# Altium PCB DE-230724.PcbDoc
Units mil, origin at the board's own origin, x right, y up, seen from the top; angles counter-clockwise.
Board outline 1771.65 x 3346.46 mil, 2 copper layers (Top Layer, Bottom Layer); 62 components, 53 nets, 173 pads, 21 vias.
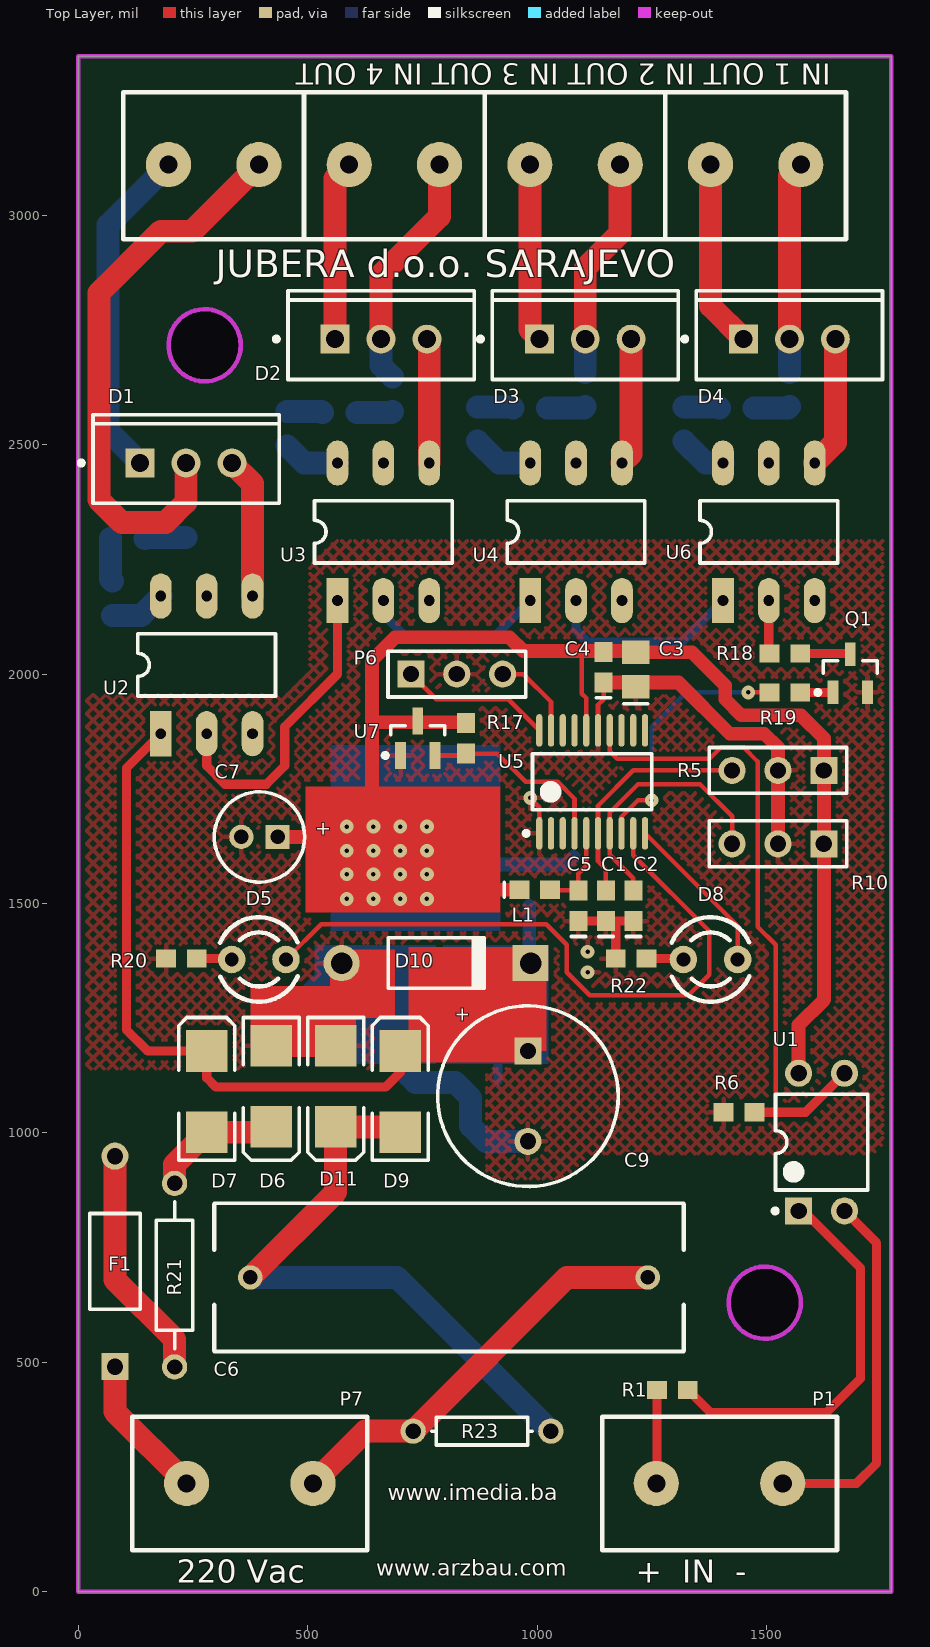
[diagram p0: Top Layer view]
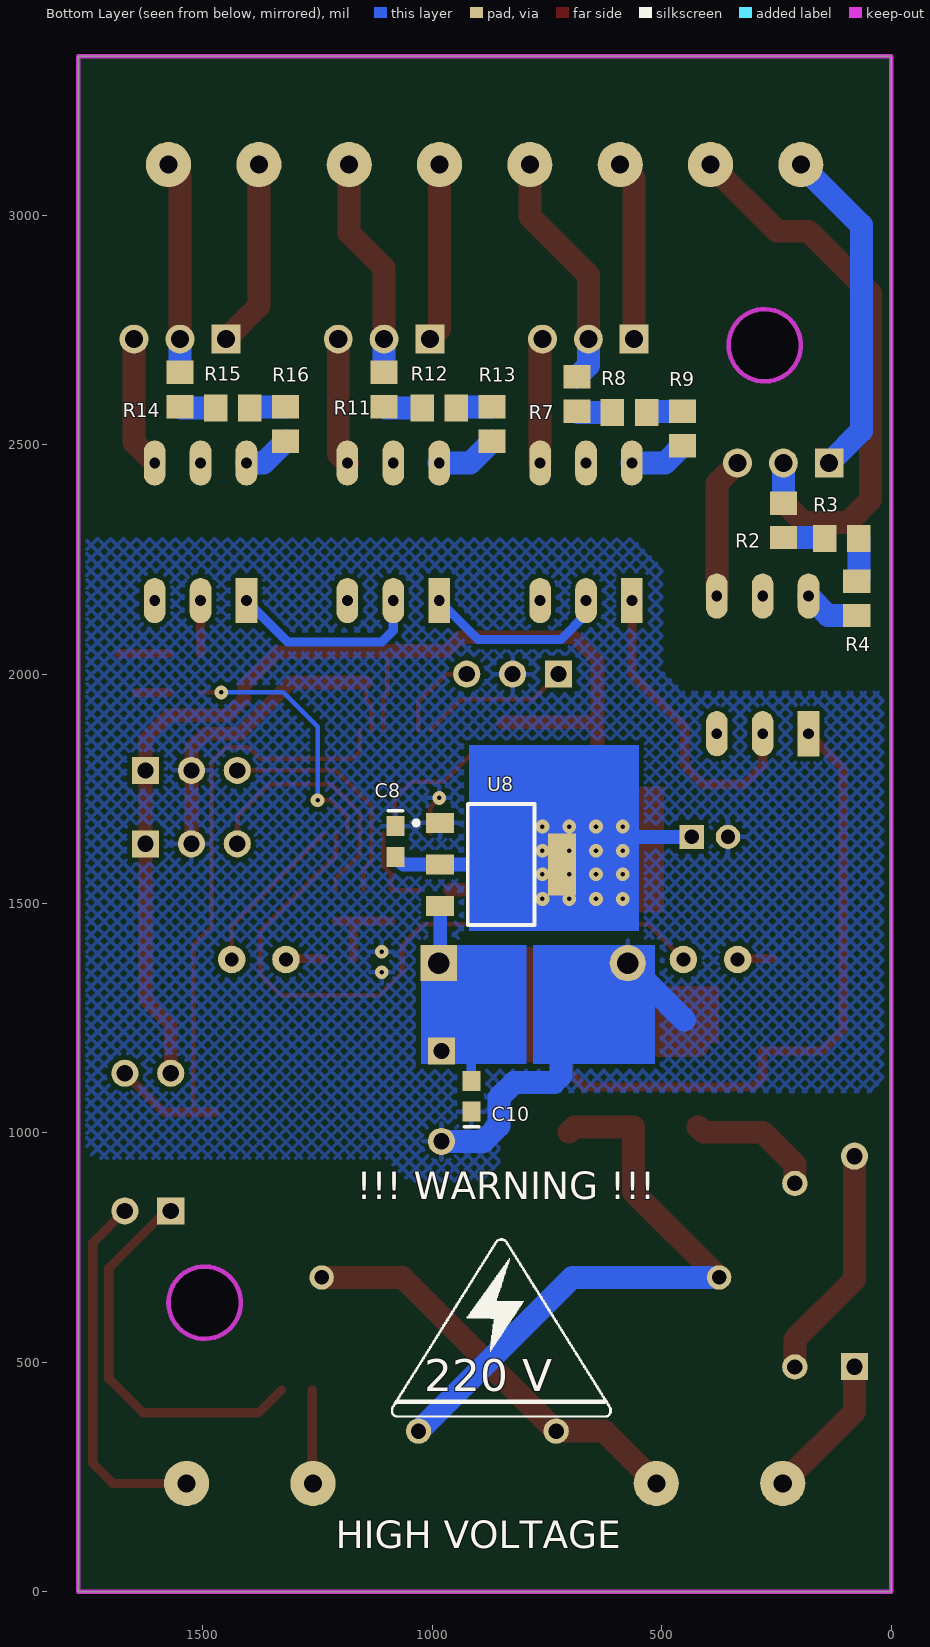
[diagram p1: Bottom Layer view, seen from below]

## Layer stack, top to bottom
Top Solder: solder mask 0.4, Solder Resist, Dk 3.5
Top Layer: signal copper 1.4
Dielectric 1: dielectric 12.6, FR-4, Dk 4.8
Bottom Layer: signal copper 1.4
Bottom Solder: solder mask 0.4, Solder Resist, Dk 3.5

## Board outline
0,0 0,3346.46 1771.65,3346.46 1771.65,0

## Design rules (kind name [scope] priority, off if disabled: settings)
Clearance [All] p1: gap=10 ignorepadtopadclearanceinfootprint=FALSE except(0: Arc-Hole Track-Hole SMDPad-Hole THPad-Hole Via-Hole Fill-Hole Poly-Hole Region-Hole Text-Hole; 5: Arc-SMDPad Track-SMDPad SMDPad-SMDPad)
HoleSize [All] p1: absolutevalues=TRUE maxlimit=200 minlimit=1 maxpercent=80.000 minpercent=20.000
MinimumSolderMaskSliver [All] p1: minsoldermaskwidth=1
PolygonConnect [All] p1: connectstyle=Relief reliefconductorwidth=10 reliefentries=4 polygonreliefangle="90 Angle" airgapwidth=10
RoutingVias [All] p1: holewidth=28 width=50 viastyle="Through Hole" minholewidth=10 minwidth=30 maxholewidth=28 maxwidth=50
SilkToSilkClearance [All] p1: silktosilkclearance=5
SilkToSolderMaskClearance [IsPad] p1: minsilkscreentomaskgap=5 clearancetoexposedcopper=TRUE
SolderMaskExpansion [All] p1: expansion=4 istentingtop=FALSE
Width [All] p1: maxlimit=100 minlimit=10 preferedwidth=20
26 further rules are at their usual default settings.

## Classes and differential pairs
component class DE-230724: C1 C2 C3 C4 C5 C6 C7 C8 C9 C10 D1 D2 D3 D4 D5 D6 D7 D8 D9 D10 D11 F1 L1 P1 P6 P7 Q1 R1 R2 R3 R4 R5 R6 R7 R8 R9 R10 R11 R12 R13 R14 R15 R16 R17 R18 R19 R20 R21 R22 R23 U1 U2 U3 U4 U5 U6 U7 U8

## Components (designator, comment, footprint, x,y, rotation, side; value= is the part's Value field where it differs from the comment)
C1 "C0603" 0603 1150,1495 r90 top value=100nF
C2 "C0603" 0603 1210,1495 r90 top value=100nF
C3 "C0805" 0805 1215,2010 r90 top value=10uF
C4 "C0603" 0603 1145,2015 r90 top value=100nF
C5 "C0603" 0603 1090,1495 r90 top value=100nF
C6 "330nF  X2" "0,33uF X2" 808.07,685 r180 top value=100nF
C7 "22uF" CAPPR2-5X11 395,1645 r180 top value=47uF
C8 "C0603" 0603 1080,1635 r270 bottom value=100nF
C9 "470uF" CAPPR5-10X12.5 980,1080 r270 top
C10 "C0603" 0603 915,1080 r90 bottom value=100nF
D1 "BTA16-600" ONSC-TO-220-3-221A-07 235,2460 r90 top
D2 "BTA16-600" ONSC-TO-220-3-221A-07 660,2730 r90 top
D3 "BTA16-600" ONSC-TO-220-3-221A-07 1105,2730 r90 top
D4 "BTA16-600" ONSC-TO-220-3-221A-07 1550,2730 r90 top
D5 "STATUS_LED" "LED 3mm" 393.7,1377.95 r0 top locked
D6 "1N4007" SMB 420.55,1101.81 r270 top
D7 "1N4007" SMB 279.99,1090 r90 top
D8 "HOLD_LED" "LED 3mm" 1377.95,1377.95 r0 top locked
D9 "1N4007" SMB 701.67,1090 r90 top
D10 "9V1" DO-41 780,1370 r0 top
D11 "1N4007" SMB 561.11,1101.81 r270 top
F1 "Fuse 1" PIN-W2/E2.8 80,720 r90 top
L1 "BLM15AG121" 0603 995,1530 r0 top
P1 "PULSE" "TERMINAL BLOK 2 - 7mm" 1397.64,236.22 r90 top locked
P2 "220Vac" "TERMINAL BLOK 2 - 3,5mm" 295.28,3110.24 r270 top locked
P3 "220Vac" "TERMINAL BLOK 2 - 3,5mm" 688.98,3110.24 r270 top locked
P4 "220Vac" "TERMINAL BLOK 2 - 3,5mm" 1082.68,3110.24 r270 top locked
P5 "220Vac" "TERMINAL BLOK 2 - 3,5mm" 1476.38,3110.24 r270 top locked
P6 "ICSP" HDR1X3 725,2000 r0 top
P7 "ACIN" "TERMINAL BLOK 2 - 7mm" 374.02,236.22 r90 top locked
Q1 "BC817" SOT23_N 1682.6,2001.34 r90 top
R1 "1K" ERA-0603 1295,440 r0 top
R2 "220R" ERA-0805 235,2335 r270 bottom
R3 "220R" ERA-0805 107.6,2295 r180 bottom
R4 "220R" ERA-0805 75,2165 r270 bottom
R5 "RPot" HDR1X3 1625,1790 r180 top value=10K
R6 "10K" ERA-0603 1440,1045 r180 top
R7 "220R" ERA-0805 685,2610 r270 bottom
R8 "220R" ERA-0805 570,2570 r180 bottom
R9 "220R" ERA-0805 455,2535 r270 bottom
R10 "RPot" HDR1X3 1625,1630 r180 top value=10K
R11 "220R" ERA-0805 1105,2620 r270 bottom
R12 "220R" ERA-0805 985,2580 r180 bottom
R13 "220R" ERA-0805 870,2545 r270 bottom
R14 "220R" ERA-0805 1550,2620 r270 bottom
R15 "220R" ERA-0805 1435,2580 r180 bottom
R16 "220R" ERA-0805 1320,2545 r270 bottom
R17 "10K" ERA-0603 845,1860 r90 top
R18 "470R" ERA-0603 1540,2045 r180 top
R19 "1K" ERA-0603 1540,1960 r0 top
R20 "10K" ERA-0603 225,1380 r180 top
R21 "Res2" AXIAL-0.4 210,690 r90 top value="470R 0.5W"
R22 "10K" ERA-0603 1205,1380 r180 top
R23 "Res1" AXIAL-0.3 880,350 r0 top value=1M
U1 "PC817" DIP-4 1620,980 r90 top
U2 "MOC3081" DIP6 180,1870 r90 top
U3 "MOC3081" DIP6 565,2160 r90 top
U4 "MOC3081" DIP6 985,2160 r90 top
U5 "STM32F030F4P6" STM-TSSOP20_N 1120,1765 r90 top
U6 "MOC3081" DIP6 1405,2160 r90 top
U7 "TLV803MDBZR" DBZ3_N 740,1860 r90 top
U8 "REG1117-3.3" ZZ311 850,1585 r270 bottom

## Footprints (in the part's own frame and the unit in brackets; to place one, negate y for a bottom-side part, rotate by r counter-clockwise, add the part's x,y. Pads: shape width x height; smd on the part's side, far side on the other; paste and mask are expansions set on the pad)
"0,33uF X2" [mm] "Capacitor, Ceramic, Thru-Hole, Dipped Radial; Body 11.5 x 3.6 mm (WxT) Pin Spacing 10.16 mm (typ)"
  round 1.35 hole 0.8: 1(-11,0) 2(11,0)
  silkscreen extent -13,-4.1 13,4.1, body extent -12.95,-4.06 12.95,4.06, height 16
0603 [mm] "Chip Capacitor; Body 1.6 x 0.8 mm (LxW typ)"
  rect 1.1x1 smd: 1(-0.85,0) 2(0.85,0)
  silkscreen extent -1.7,-0.4 -1.7,0.4
0805 [mm] "Chip Capacitor; Body 2.0 x 1.2 mm (LxW typ)"
  rect 1.3x1.5 smd: 1(-0.95,0) 2(0.95,0)
  silkscreen extent -1.9,-0.65 -1.9,0.65
AXIAL-0.3 [mm] "Axial Device, Thru-Hole; 2 Leads; 0.3 in Pin Spacing"
  round 1.4 hole 0.85: 1(-3.81,0) 2(3.81,0)
  silkscreen extent -2.77,-0.76 2.77,0.76
AXIAL-0.4 [mm] "Axial Device, Thru-Hole; 2 Leads; 0.4 in Pin Spacing"
  round 1.4 hole 0.85: 1(-5.08,0) 2(5.08,0)
  silkscreen extent -4.06,-1.02 4.06,1.02
CAPPR2-5X11 [mm] "Capacitor, Electrolytic, Radial; Body 5 x 11 mm (Dia.xH typ); Pin Spacing 2 mm (typ)"
  rect 1.35x1.35 hole 0.8: 1(-1,0)
  round 1.35 hole 0.8: 2(1,0)
  silkscreen extent -2.5,-2.5 2.5,2.5
CAPPR5-10X12.5 [mm] "Capacitor, Electrolytic, Radial; Body 10 x 12.5 mm (Dia.xH typ); Pin Spacing 5 mm (typ)"
  rect 1.5x1.5 hole 0.9: 1(-2.5,0)
  round 1.5 hole 0.9: 2(2.5,0)
  silkscreen extent -5,-5 5,5, body extent -5,-5 5,5, height 12.5
DBZ3_N [mm] "SOT23, 3-Leads, Body 2.9x1.3mm, Pitch 0.95mm, Lead Span 2.4mm, IPC Medium Density"
  rect 1.5x0.6 smd: 1(-0.95,0.95) 2(-0.95,-0.95) 3(0.95,0)
  silkscreen extent -1.07,-1.5 0.7,1.92, body extent -0.7,-1.52 0.7,1.52, height 1.12
DIP6 [mm]
  rect 2.5x1.2 hole 0.6: 1(0,0)
  oval 2.5x1.2 hole 0.6: 2(0,-2.54) 3(0,-5.08) 4(7.62,-5.08) 5(7.62,-2.54) 6(7.62,0)
  silkscreen extent 2.08,-6.35 5.54,1.27, body extent 0.63,-6.48 6.98,1.27, height 1
DIP-4 [mm] "DIP; 4 Leads; Row Spacing 7.62 mm; Pitch 2.54 mm"
  rect 1.5x1.5 hole 0.9: 1(-3.81,1.27)
  round 1.5 hole 0.9: 2(-3.81,-1.27) 3(3.81,-1.27) 4(3.81,1.27)
  silkscreen extent -3.93,-2.55 2.65,2.69, body extent -3.15,-2.5 3.15,2.5, height 5.6
DO-41 [mm] "Diode, Axial; Body 5.2 x 2.7 mm (LxDia. max), Lead Dia. 0.86 mm (max)"
  round 2 hole 1.2: 1(-5.23,0)
  rect 2x2 hole 1.2: 2(5.23,0)
  silkscreen extent -2.65,-1.4 2.75,1.4
ERA-0603 [mm] "Chip Resistor; Body 1.6 x 0.8 mm (LxW typ)"
  rect 1.1x1 smd: 1(-0.85,0) 2(0.85,0)
ERA-0805 [mm] "Chip Resistor; Body 2 x 1.3 mm (LxW typ)"
  rect 1.3x1.5 smd: 1(-0.95,0) 2(0.95,0)
HDR1X3 [mm] "Connector; Header; 3 Position"
  rect 1.5x1.5 hole 0.9: 1(0,0)
  round 1.5 hole 0.9: 2(2.54,0) 3(5.08,0)
  silkscreen extent -1.27,-1.27 6.35,1.27
"LED 3mm" [mil] "LED 3mm"
  round 60 hole 30: 1(-59.06,0) 2(59.06,0)
  silkscreen extent -85,-92 85,92, body extent -59,-59 59,59, height 394
ONSC-TO-220-3-221A-07 [mm] "FM, 3-Leads, Body 10.3x4.85mm, Pitch 2.54mm"
  rect 1.6x1.6 hole 1: 1(0,2.54)
  round 1.6 hole 1: 2(0,0) 3(0,-2.54)
  silkscreen extent -2.23,-5.15 2.67,5.92, body extent -2.21,-5.15 2.64,5.15, height 19.68
PIN-W2/E2.8 [mm] "Thru-Hole; 2 Leads"
  rect 1.5x1.5 hole 0.9: 1(-5.825,0)
  round 1.5 hole 0.9: 2(5.825,0)
  silkscreen extent -2.65,-1.4 2.65,1.4
SMB [mm] "DO-214-AA/SMB; 2 C-Bend Leads; Body 5.3 x 3.6 mm, inc. leads (LxW)"
  rect 2.3x2.3 smd: 1(-2.25,0) 2(2.25,0)
  silkscreen extent -3.8,-1.55 4.1,1.55, body extent -3.3,-1.52 3.3,1.52, height 3
SOT23_N [mm] "SOT23, 3-Leads, Body 2.9x1.3mm, Pitch 0.95mm, Lead Span 2.3mm, IPC Medium Density"
  rect 1.3x0.6 smd: 1(-1.05,0.95) 2(-1.05,-0.95) 3(1.05,0)
  silkscreen extent -1.17,-1.5 0.7,1.92, body extent -0.7,-1.5 0.7,1.5, height 1.1
STM-TSSOP20_N [mm] "SOP, 20-Leads, Body 6.6x4.5mm, Pitch 0.65mm, IPC Medium Density"
  oval 1.8x0.35 smd: 1(-2.85,2.925) 2(-2.85,2.275) 3(-2.85,1.625) 4(-2.85,0.975) 5(-2.85,0.325) 6(-2.85,-0.325) 7(-2.85,-0.975) 8(-2.85,-1.625) 9(-2.85,-2.275) 10(-2.85,-2.925) 11(2.85,-2.925) 12(2.85,-2.275) 13(2.85,-1.625) 14(2.85,-0.975) 15(2.85,-0.325) 16(2.85,0.325) 17(2.85,0.975) 18(2.85,1.625) 19(2.85,2.275) 20(2.85,2.925)
  silkscreen extent -2.97,-3.3 1.55,3.77, body extent -2.25,-3.3 2.25,3.3, height 1.2
"TERMINAL BLOK 2 - 3,5mm" [mm] "Terminal blok 3,5mm"
  round 2.5 hole 1: 1(0,-2.5) 2(0,2.5)
  silkscreen extent -4,-5 4.13,5, body extent -4.06,-4.83 4.06,4.83, height 10
"TERMINAL BLOK 2 - 7mm" [mm] "Terminal blok 7mm"
  round 2.5 hole 1: 1(0,-3.5) 2(0,3.5)
  silkscreen extent -3.7,-6.5 3.7,6.5, body extent -3.56,-6.35 3.56,6.35, height 10
ZZ311 [mm] "SOT-223/SC-73; 4 Leads; Body 6.7 x 7.3 mm, inc. leads (LxW max)"
  rect 1.1x1.55 smd: 1(-2.3,-3.375) 2(0,-3.375) 3(2.3,-3.375)
  rect 3.45x1.55 smd: 4(0,3.375)
  silkscreen extent -3.35,-4.83 3.35,1.85

## Part data
C1 C2 C3 C4 C5: "Ceramic Chip Capacitor - 25V", PackageDocument=Mar-2001, ComponentLink1Description="Manufacturer Link", ComponentLink1URL=http://www.kemet.com/, ComponentLink2Description=Datasheet, ComponentLink2URL=http://www.kemet.com/kemet/web/homepage/kechome.nsf/vapubfilesname/F3102TA.pdf/$file/F3102TA.pdf, DatasheetDocument=Mar-2001, LatestRevisionDate=19-Mar-2004, LatestRevisionNote="Silkscreen size reduced.", Note="Footprint corresponds to dimensions for bulk cassette packaging. This case size has tightened tolerances.", Published=17-Jul-2002, Publisher="Altium Limited"
  C1 C2 C4 C5: Code_IPC="1608 [0603]", Code_JEITA=0603, PackageReference=0603
  C3: Code_IPC=2012[0805], Code_JEITA=0805, PackageReference=0805
C6: library part "0,33uF X2", "Dipped Radial Multilayer Ceramic Capacitor COG (NPO): 330nF 275VAC X2", PackageDocument=2-Jan-2002, ComponentLink1Description="Manufacturer Link", ComponentLink1URL=http://www.vishay.com/, DatasheetDocument=2-Jan-2002, LatestRevisionDate=19-Mar-2004, LatestRevisionNote="PCB Footprint - Drill hole diameter reduced.", PackageReference=VP60-3.6, Published=17-Dec-2003, Publisher="Altium Limited"
C7: library part EKA00AA247F00, "Aluminum Electrolytic Capacitor, Radial Style with Long Leads: 47uF, 35V", ComponentLink1Description="Manufacturer Link", ComponentLink1URL=http://www.vishay.com/, ComponentLink2Description=Datasheet, ComponentLink2URL=http://www.vishay.com/docs/25014/eka.pdf, DatasheetDocument=20-Feb-2001, DrillSize="Nominal, Rounded To The Nearest 0.1mm", Note="Refer to Manufacturer's Data Sheets for other lead formations", PackageReference=CAPPR2-5X11, Published=19-Mar-2004, Publisher="Altium Limited"
C8 C10: "Ceramic Chip Capacitor - Standard", PackageDocument=Mar-2001, Code_IPC="1608 [0603]", Code_JEITA=0603, ComponentLink1Description="Manufacturer Link", ComponentLink1URL=http://www.kemet.com/, ComponentLink2Description=Datasheet, ComponentLink2URL=http://www.kemet.com/kemet/web/homepage/kechome.nsf/vapubfilesname/F3102TA.pdf/$file/F3102TA.pdf, DatasheetDocument=Mar-2001, LatestRevisionDate=19-Mar-2004, LatestRevisionNote="Silkscreen size reduced.", Note="Footprint corresponds to dimensions for bulk cassette packaging. This case size has tightened tolerances.", PackageReference=0603, Published=17-Jul-2002, Publisher="Altium Limited"
C9: library part EKA00DC347E00, "Aluminum Electrolytic Capacitor, Radial Style with Long Leads: 470uF, 25V", ComponentLink1Description="Manufacturer Link", ComponentLink1URL=http://www.vishay.com/, ComponentLink2Description=Datasheet, ComponentLink2URL=http://www.vishay.com/docs/25014/eka.pdf, DatasheetDocument=20-Feb-2001, DrillSize="Nominal, Rounded To The Nearest 0.1mm", Note="Refer to Manufacturer's Data Sheets for other lead formations", PackageReference=CAPPR5-10X12.5, Published=19-Mar-2004, Publisher="Altium Limited"
D1 D2 D3 D4: library part BTA08-600BW3G, "Triacs, Silicon Bidirectional Thyristor, 3-Pin TO-220, Pb-Free, Tube", Manufacturer="On Semiconductor", Supplier Part Number 1=BTA08-600BW3G-ND, ComponentLink1Description="Manufacturer URL", ComponentLink1URL=http://www.onsemi.com/, ComponentLink2Description=Datasheet, ComponentLink2URL=http://www.onsemi.com/pub_link/Collateral/BTA08-600BW3-D.PDF, ComponentLink3Description="Package Specification", ComponentLink3URL=http://www.onsemi.com/pub_link/Collateral/221A-07.PDF, DatasheetVersion="Rev. 1", IGT Max (mA)=50, IT(RMS) Max (A)=8, ITSM Max (A)=90, Mounting Technology="Through Hole", PackageDescription="3-Pin Flange Mount, Vertical Straight Lead, Body 9.97 x 4.445 mm, Pitch 2.54 mm", PackageReference=TO-220-3-221A-07, PackageVersion="Rev. O, 07/2008", Packing=Tube, PartNumber=BTA08-600BW3G, RoHS=Pb-Free, Supplier 1=Digi-Key, Supplier 2=Newark, Supplier 3=Mouser, Supplier Part Number 2=13P2072, Supplier Part Number 3=863-BTA08-600BW3G
D5 D8: library part "LED 3mm"
D6 D7 D9 D11: library part "Diode 1N4007", "1 Amp General Purpose Rectifier", Code_JEDEC=DO-204-AL, ComponentLink1Description="Manufacturer Link", ComponentLink1URL=http://www.fairchildsemi.com/, ComponentLink2Description=Datasheet, ComponentLink2URL=http://www.fairchildsemi.com/ds/1N%2F1N4001.pdf, DatasheetVersion=1998, LatestRevisionDate=17-Jul-2002, LatestRevisionNote="Re-released for DXP Platform.", PackageDescription="Diode, Axial; Body 5.2 x 2.7 mm (LxDia. max), Lead Dia. 0.86 mm (max)", PackageReference=DO-41, PackageVersion=Aug-1999, Published=8-Jun-2000, Publisher="Altium Limited"
D10: library part "Diode 1N914", "High Conductance Fast Diode", Code_JEDEC=DO-204-AH, ComponentLink1Description="Manufacturer Link", ComponentLink1URL=http://www.fairchildsemi.com/, ComponentLink2Description=Datasheet, ComponentLink2URL=http://www.fairchildsemi.com/ds/1N%2F1N4448.pdf, DatasheetVersion=1997, LatestRevisionDate=17-Jul-2002, LatestRevisionNote="Re-released for DXP Platform.", PackageDescription="Diode, Axial; Body 3.8 x 1.9 mm (LxDia. max), Lead Dia. 0.53 mm (max)", PackageReference=DO-35, Published=8-Jun-2000, Publisher="Altium Limited"
F1: "Fuse", LatestRevisionDate=17-Jul-2002, LatestRevisionNote="Re-released for DXP Platform.", PackageDescription="Thru-Hole; 2 Leads", PackageReference=PIN-W2/E2.8, Published=8-Jun-2000, Publisher="Altium Limited"
L1: library part Inductor_SMD, "Inductor", Code_IEC=1005, Code_JEITA=0402, LatestRevisionDate=29-May-2009, LatestRevisionNote="IPC-7351 Footprint Added.", PackageDescription="Chip Inductor", PackageReference=0402-A, Published=8-Jun-2000, Publisher="Altium Limited"
P1 P2 P3 P4 P5 P7: library part "TERMINAL BLOK 2", "Terminal blok konektor 3,5 mm"
P6: library part "Header 3", "Header, 3-Pin", LatestRevisionDate=17-Jul-2002, LatestRevisionNote="Re-released for DXP Platform.", Publisher="Altium Limited"
Q1: "NPN General-purpose Transistor", ComponentLink1Description="Manufacturer Link", ComponentLink1URL=http://www.semiconductors.philips.com/, ComponentLink2Description=Datasheet, ComponentLink2URL=http://www.semiconductors.philips.com/acrobat/datasheets/BC817_BC817W_BC337_5.pdf, DatasheetVersion=Jun-1999, LatestRevisionDate=12-Dec-2006, LatestRevisionNote="IPC-7351 Footprint Added.", PackageDescription="3-Pin SOT-23 Package 0.95 mm Pitch, 2.3 mm Lead Span", PackageReference=SOT23, PackageVersion=May-1999, Published=17-Sep-2003, Publisher="Altium Limited"
R1 R6 R17 R18 R19 R20 R22: library part ERAV, "Metal Film Thermosensitive Chip Resistor, 0.56 Ohm to 10k Ohm Range, 5% Tolerance, 0603 Size, 0.063 W", PackageDocument=Mar-2003, Code_IPC="1608 [0603]", ComponentLink1Description="Manufacturer Link", ComponentLink1URL=http://www.panasonic.com/industrial/components/resistive_products.htm, ComponentLink2Description=Datasheet, ComponentLink2URL=http://www.panasonic.com/industrial/components/pdf/AOF0000CE1.pdf, LatestRevisionDate=19-Mar-2004, LatestRevisionNote="Silkscreen size reduced.", Note="If flow soldering, adjust pad width of PCB Footprint to 0.7 - 0.8 times the width of the resistor.", PackageReference=ERA-0603, Published=17-Dec-2003, Publisher="Altium Limited"
R2 R3 R4 R7 R8 R9 R11 R12 R13 R14 R15 R16: library part ERAS, "Metal Film Thermosensitive Chip Resistor, 0.56 Ohm to 10k Ohm Range, 5% Tolerance, 0805 Size, 0.1 W", PackageDocument=Mar-2003, Code_IPC="2012 [0805]", ComponentLink1Description="Manufacturer Link", ComponentLink1URL=http://www.panasonic.com/industrial/components/resistive_products.htm, ComponentLink2Description=Datasheet, ComponentLink2URL=http://www.panasonic.com/industrial/components/pdf/AOF0000CE1.pdf, LatestRevisionDate=19-Mar-2004, LatestRevisionNote="Silkscreen size reduced.", Note="If flow soldering, adjust pad width of PCB Footprint to 0.7 - 0.8 times the width of the resistor.", PackageReference=ERA-0805, Published=17-Dec-2003, Publisher="Altium Limited"
R5 R10: "Potentiometer", LatestRevisionDate=17-Jul-2002, LatestRevisionNote="Re-released for DXP Platform.", PackageDescription="Variable Resistor, Thru-Hole; 3 Leads", PackageReference=VR5, Published=8-Jun-2000, Publisher="Altium Limited", Set Position=0.5, Sim Note="Enter the Resistance value and the set point into parameter fields."
R21 R23: "Resistor", LatestRevisionDate=17-Jul-2002, LatestRevisionNote="Re-released for DXP Platform.", Published=8-Jun-2000, Publisher="Altium Limited"
  R21: PackageDescription="Axial Device, Thru-Hole; 2 Leads; 0.4 in Pin Spacing", PackageReference=AXIAL-0.4
  R23: PackageDescription="Axial Device, Thru-Hole; 2 Leads; 0.3 in Pin Spacing", PackageReference=AXIAL-0.3
U1: "4-Pin Phototransistor Optocoupler", DatasheetVersion=Nov-2003, LatestRevisionDate=04-Mar-2005, LatestRevisionNote="Sch pins 3 & 4 Swapped.", PackageReference=DIP-4, Published=24-Mar-1999, Publisher="Altium Limited"
U2 U3 U4 U6: "Zero-Cross Optoisolator Triac Driver"
U5: "ARM Cortex-M0 32-bit MCU, 16 KB Flash, 4 KB Internal RAM, 15 I/Os, 20-pin TSSOP, -40 to 85 degC, Tube", I/Os (High Current)=15, Operating Frequency(F) (Processor speed) (MHz)=48, Supplier Part Number 1=497-14044-5-ND, Supply Voltage(Vcc) min (V)=2.4, ComponentLink1Description="Manufacturer URL", ComponentLink1URL=http://www.st.com/web/en/home.html, ComponentLink2Description=Datasheet, ComponentLink2URL=http://www.st.com/st-web-ui/static/active/en/resource/technical/document/datasheet/DM00088500.pdf, ComponentLink3Description="Package Specification", ComponentLink3URL=http://www.st.com/st-web-ui/static/active/en/resource/technical/document/datasheet/DM00065136.pdf, Core="ARM Cortex-M0", DatasheetVersion="Rev. 1", FLASH Size (Prog) (kB)=16, Internal RAM Size (kB)=4, Mounting Technology="Surface Mount", PackageDescription="20-Pin Thin Shrink Small Outline Package, 6.5 x 4.4 mm Body, 0.65 mm Pitch", PackageReference=TSSOP20, PackageVersion="Rev. 1, 11/2012", Packing=Tube, PartNumber=STM32F030F4P6, Supplier 1=Digi-Key, Supplier 2=Newark, Supplier 3=Mouser, Supplier Part Number 2=06X3648, Supplier Part Number 3=511-STM32F030F4P6
U7: "Voltage Supervisor with Active-Low, Open Drain Reset, 1 Supply Monitored, -40 to 125 degC, 3-pin SOT-23 (DBZ), Green (RoHS & no Sb/Br)", Manufacturer="Texas Instruments", Rating=Catalog, Supplier Part Number 1=296-29194-2-ND, Threshold Voltage 1 (typ)(Typ)(V)=4.38, # of supplies monitored=1, Code_JEDEC=TO-236-AB, ComponentLink1Description=Datasheet, ComponentLink1URL=http://www.ti.com/general/docs/lit/getliterature.tsp?genericPartNumber=TLV803M&fileType=pdf, DatasheetVersion=SBVS157B, Iq(Typ)(uA)=9, Mounting Technology="Surface Mount", Output Driver Type / Reset Output="Active-low, Open-drain", PackageDescription="3-Pin Plastic Small-Outline Package, 0.95 mm Pitch, 2.4 mm Lead Span", PackageReference=DBZ3, PackageVersion="revB, Apr-2005", PartNumber=TLV803MDBZR, Reset Threshold Accuracy(%)=2, SubFamily="Supervisor and Reset IC", Supplier 1=Digi-Key, Supplier 2=Digi-Key, Supplier 3=Digi-Key, Supplier 4=Newark, Supplier 5=Mouser, Supplier Part Number 2=296-29194-1-ND, Supplier Part Number 3=296-29194-6-ND, Supplier Part Number 4=58T0286, Supplier Part Number 5=595-TLV803MDBZR, Time Delay(ms)=200, VCC(Max)(V)=6, VCC(Min)(V)=1.1
U8: "800mA and 1A Low Dropout Positive Regulator 2.85V, 3.3V, 5V, and Adjustable", ComponentLink1Description="Manufacturer Link", ComponentLink1URL=http://www.ti.com/, ComponentLink2Description=Datasheet, ComponentLink2URL=http://www-s.ti.com/sc/ds/REG1117.pdf, DatasheetVersion=Sep-1997, LatestRevisionDate=17-Jul-2002, LatestRevisionNote="Re-released for DXP Platform.", PackageDescription="SOT-223/SC-73; 4 Leads; Body 6.7 x 7.3 mm, inc. leads (LxW max)", PackageReference=ZZ311, PackageVersion=revC, Published=8-Jun-2000, Publisher="Altium Limited"

## Free pads (board coordinates)
  round 0 hole 157.48: ""(275.59,2716.54) ""(1496.06,629.92)

## Via types
v1: diameter 30, hole 10, Top Layer to Bottom Layer, 21 vias

## Nets (pads, with @x,y where several pads share a name; then routed paths per layer and width w, separated by ;. In a path a pad name is that pad's centre, name@x,y a point inside that pad or via, vN(x,y) a via of type N, cw(c..) or ccw(c..) an arc to the next point about the centre after c; other vN are vias at no path point)
3V3: C3.2 C4.2 C7.1 C8.2 L1.1 R5.1 R10.1 R17.2 U1.4 U5.16 U7.3 U8.2 U8.4 | length 3410.7
  Top Layer w10: 1097.6,2050 1097.6,1957.4 1107.2,1947.8 U5.16
  Top Layer w30: C7.1 540,1645 ; 650,1717.5 640,1727.5 640,1895 ; R17.2 843.46,1895 640,1895 ; 900,1530 L1.1 ; U1.4 1570,1235 1625,1290 R10.1 R5.1 1625,1860 1575,1910 1445,1910 1410,1945 1410,1975 1337.6,2047.4 C3.2 1212.4,2050 1097.6,2050 970,2050 940,2080 690,2080 640,2030 640,1895
  Bottom Layer w30: C7.1 745,1645 805,1585 U8.2 1063.46,1585 C8.2
  other v1: 585,1510 643.33,1510 701.67,1510 760,1510 585,1563.75 643.33,1563.75 701.67,1563.75 760,1563.75 585,1615 643.33,1615 701.67,1615 760,1615 585,1667.5 643.33,1667.5 701.67,1667.5 760,1667.5
9V1: C9.1 C10.2 D7.2 D9.2 D10.2 U2.1 U8.3 | length 2073.5
  Top Layer w20: U2.1 105,1795 105,1225 151.42,1178.58 D7.2 279.99,1120.01 300,1100 670,1100 701.67,1131.67 D9.2
  Top Layer w50: D9.2 979.84,1178.58 C9.1
  Bottom Layer w20: C10.2 915,1170 ; D10.2@980,1364.09 D10.2 D10.2@982.87,1373.03
  Bottom Layer w30: D10.2@982.87,1373.03 U8.3
  Bottom Layer w50: C9.1 D10.2@980,1364.09
DELAY: C2.2 R10.3 U5.7 | length 572.4
  Top Layer w10: C2.2 1210,1555 1158.39,1606.61 U5.7 1158.39,1698.39 1220,1760 1355,1760 1425,1690 R10.3
GND: C1.1 C2.1 C3.1 C4.1 C5.1 C7.2 C8.1 C9.2 C10.1 D6.1 D10.1 D11.1 P6.2 Q1.2 R5.2 R6.2 R10.2 R20.2 R22.2 U5.1 U5.15 U7.1 U8.1 | length 1947.1
  Top Layer w10: v1(985,1730) 1004.84,1710.16 U5.1 ; U5.15 1132.8,1932.8 1145,1945 C4.1
  Top Layer w20: C5.1 C1.1 1170,1461.54 ; R22.2 1171.54,1460 1170,1461.54 ; C2.1 1170,1461.54
  Top Layer w30: C4.1 1308.46,1981.54 1420,1870 1495,1870 1525,1840 R5.2 R10.2
  Top Layer w50: D6.1 D11.1 574.09,1203.38 D10.1
  Bottom Layer w50: 450,1245.91 D10.1 ; 720,1170 720,1125 735,1110 821.51,1110 855,1076.51 855,1015 888.43,981.57 C9.2
  other v1: 1110,1350 1110,1395
HOLD_LED: D8.2 U5.10 | length 358.5
  Top Layer w10: U5.10 1437.01,1450.94 D8.2
NetC5_2: C5.2 L1.2 U5.5 | length 193.6
  Top Layer w10: L1.2 1030,1528.46 C5.2 1090,1565 1107.2,1582.2 U5.5
NetC6_1: C6.1 P7.1 R23.1 | length 915.2
  Top Layer w50: P7.1 625.59,350 R23.1 1065,685 C6.1
NetC6_2: C6.2 D9.1 D11.2 R23.2 | length 1344.5
  Top Layer w50: C6.2 561.11,871.11 D11.2 689.86,1013.23 D9.1
  Bottom Layer w50: C6.2 695,685 R23.2
NetD1_1: D1.1 P2.1 | length 733.8
  Bottom Layer w50: D1.1 65,2530 65,2978.39 P2.1
NetD1_2: D1.2 P2.2 R2.1 | length 1316.7
  Top Layer w50: D1.2 235,2375 190,2330 95,2330 45,2380 45,2830 180,2965 248.46,2965 P2.2
  Bottom Layer w50: R2.1 D1.2
NetD1_3: D1.3 U2.4 | length 308.6
  Top Layer w50: D1.3 380,2415 U2.4
NetD2_1: D2.1 P3.1 | length 392.9
  Top Layer w50: D2.1 560,3079.68 P3.1
NetD2_2: D2.2 P3.2 R7.1 | length 526
  Top Layer w50: D2.2 660,2870 787.4,2997.4 P3.2
  Bottom Layer w50: D2.2 660,2672.4 R7.1
NetD2_3: D2.3 U3.4 | length 272.1
  Top Layer w50: D2.3 765,2725 U3.4
NetD3_1: D3.1 P4.1 | length 388.8
  Top Layer w50: P4.1 984.25,2750.75 D3.1
NetD3_2: D3.2 P4.2 R11.1 | length 484.4
  Top Layer w50: D3.2 1105,2885 1181.1,2961.1 P4.2
  Bottom Layer w50: R11.1 D3.2
NetD3_3: D3.3 U4.4 | length 278.3
  Top Layer w50: U4.4 1205,2480 D3.3
NetD4_1: D4.1 P5.1 | length 410.1
  Top Layer w50: P5.1 1377.95,2802.05 D4.1
NetD4_2: D4.2 P5.2 R14.1 | length 463.1
  Top Layer w50: D4.2 1550,3085.43 P5.2
  Bottom Layer w50: R14.1 D4.2
NetD4_3: D4.3 U6.4 | length 288.6
  Top Layer w50: U6.4 1650,2505 D4.3
NetD5_1: D5.1 R20.1 | length 77
  Top Layer w20: R20.1 332.6,1380 D5.1
NetD6_2: D6.2 D7.1 R21.2 | length 285.9
  Top Layer w50: R21.2 210,931.43 D7.1 408.74,1001.42 D6.2
NetD8_1: D8.1 R22.1 | length 81.3
  Top Layer w20: R22.1 1316.85,1380 D8.1
NetF1_1: F1.1 P7.2 | length 319.2
  Top Layer w50: F1.1 80,392.44 P7.2
NetF1_2: F1.2 R21.1 | length 513.2
  Top Layer w50: F1.2 80,680 210,550 R21.1
NetP1_1: P1.1 U1.2 | length 801.7
  Top Layer w20: P1.1 1696.22,236.22 1740,280 1740,760 U1.2
NetP1_2: P1.2 R1.1 | length 204.5
  Top Layer w20: P1.2 1261.54,237.91 R1.1
NetQ1_1: Q1.1 R19.2 | length 71.7
  Top Layer w20: R19.2 Q1.1
NetQ1_3: Q1.3 R18.1 | length 110.1
  Top Layer w20: R18.1 1680.28,2045 Q1.3
NetR1_2: R1.2 U1.1 | length 855.1
  Top Layer w20: R1.2 1378.46,390 1630,390 1705,465 1705,705 1580,830 U1.1
NetR2_2: R2.2 R3.1 | length 91.1
  Bottom Layer w50: R3.1 147.6,2297.6 R2.2
NetR3_2: R3.2 R4.1 | length 94.6
  Bottom Layer w50: R3.2 70.2,2207.2 R4.1
NetR4_2: R4.2 U2.6 | length 122.6
  Bottom Layer w50: R4.2 137.6,2127.6 U2.6
NetR7_2: R7.2 R8.1 | length 78.7
  Bottom Layer w50: R8.1 682.4,2570 R7.2
NetR8_2: R8.2 R9.1 | length 78.6
  Bottom Layer w50: R9.1 530.2,2572.4 R8.2
NetR9_2: R9.2 U3.6 | length 125.6
  Bottom Layer w50: R9.2 492.6,2460 U3.6
NetR11_2: R11.2 R12.1 | length 83.7
  Bottom Layer w50: R12.1 1102.4,2580 R11.2
NetR12_2: R12.2 R13.1 | length 78.6
  Bottom Layer w50: R13.1 945.2,2582.4 R12.2
NetR13_2: R13.2 U4.6 | length 134.7
  Bottom Layer w50: R13.2 917.6,2460 U4.6
NetR14_2: R14.2 R15.1 | length 78.7
  Bottom Layer w50: R15.1 1547.4,2580 R14.2
NetR15_2: R15.2 R16.1 | length 78.6
  Bottom Layer w50: R16.1 1395.2,2582.4 R15.2
NetR16_2: R16.2 U6.6 | length 104.7
  Bottom Layer w50: R16.2 1367.6,2460 U6.6
NetR17_1: R17.1 U5.4 U7.2 | length 422.1
  Top Layer w10: U7.2 841.06,1822.6 R17.1 913.46,1826.54 975,1765 1045,1765 1081.61,1728.39 U5.4
NetR18_2: R18.2 U6.2 | length 115.6
  Top Layer w20: U6.2 1505,2046.54 R18.2
NetU2_2: U2.2 U3.1 | length 680.8
  Top Layer w20: U2.2 280,1800 320,1760 410,1760 450,1800 450,1885 565,2000 U3.1
NetU3_2: U3.2 U4.1 | length 408
  Bottom Layer w20: U3.2 665,2130 720,2075 900,2075 U4.1
NetU4_2: U4.2 U6.1 | length 432.6
  Bottom Layer w20: U4.2 1085,2095 1110,2070 1315,2070 U6.1
OUTCTR: R19.1 U5.8 | length 564.7
  Top Layer w10: U5.8 1183.98,1688.98 1220,1725 v1(1250,1725) ; v1(1460,1960) R19.1
  Bottom Layer w10: v1(1250,1725) 1250,1885 1325,1960 v1(1460,1960)
PULSE: R6.1 U1.3 U5.14 | length 1410.2
  Top Layer w10: U5.14 1158.39,1831.61 1175,1815 1375,1815 1400,1840 1450,1840 1480.47,1809.53 1480.47,1449.53 1520,1410 1520,1045
  Top Layer w20: R6.1 1520,1045 1585,1045 U1.3
SETPOINT: C1.2 R5.3 U5.6 | length 515.6
  Top Layer w10: C1.2 1150,1575 1132.8,1592.2 U5.6 1132.8,1712.8 1210,1790 R5.3
STATUS_LED: D5.2 U5.9 | length 1448.5
  Top Layer w10: D5.2 529.8,1455 1020,1455 1065,1410 1065,1350 1115,1300 1330,1300 1375,1345 1375,1440 1209.57,1605.43 U5.9
SWCLK: P6.1 U5.20 | length 330.7
  Top Layer w10: P6.1 780,1945 937.05,1945 U5.20
SWDIO: P6.3 U5.19 | length 192.8
  Top Layer w10: P6.3 970,2000 1030.43,1939.57 U5.19
pads on no net: U2.3 U2.5 U3.3 U3.5 U4.3 U4.5 U5.2 U5.3 U5.11 U5.12 U5.13 U5.17 U5.18 U6.3 U6.5

## Polygon pours and split planes (outlines as drawn)
GND on Top Layer "Bottom Layer-No Net" (hatched 45Degree grid 20 track 8, remove dead copper, pour order 0): 0,1955 455,1955 505,2005 505,2235 560,2290 1770,2290 1770,996.65 1771.65,995 1731.65,955 1115,955 1055,900 1030,900 890,900 890,1135 880,1145 875,1140 0,1140
GND on Bottom Layer "Bottom Layer-No Net" (hatched 45Degree grid 20 track 8, remove dead copper, pour order 2): 0,1960 455,1960 505,2010 500,2015 500,2235 505,2235 565,2295 1771.65,2295 1771.65,981.65 1735,945 1100,945 1050,895 895,895 855,935 855,1090 45,1090 0,1135

## Keep-outs
Keep-Out Layer:
  circle w10: c1496.06,629.92 r78.74
  circle w10: c275.59,2716.54 r78.74
  lines w10: 0,0 1771.65,0 1771.65,3346.46 0,3346.46 0,0

## Other copper
Top Layer:
  rectangle net 3V3: 495,1480 920,1755
  rectangle net 9V1: 720,1178.58 1020,1405
  rectangle net GND: 550,1250 690,1400
  rectangle net GND: 375,1195 605,1320
Bottom Layer:
  rectangle net 3V3: 550,1440 920,1845
  rectangle net 9V1: 795,1150 1025,1410
  rectangle net GND: 515,1150 780,1410

## Silkscreen, mask and mechanical layers (free items; w line width, h text height)
Top Overlay:
  text "IN 1 OUT IN 2 OUT IN 3 OUT IN 4 OUT" at 1640,3330 h45 r180
  text "JUBERA d.o.o. SARAJEVO" at 300,2865 h60
  text "www.imedia.ba" at 675,200 h35
  text "www.arzbau.com" at 650,35 h35
  text "220 Vac" at 215,20 h50
  text "+  IN  -" at 1215,20 h50
Bottom Overlay:
  drawing of 3 lines, arcs and shapes, not listed
  text "!!! WARNING !!!" at 1165,855 h60
  text "220 V" at 1017,437.12 h70
  text "HIGH VOLTAGE" at 1210,95 h60

## Dimensions
1496.06,629.92 to 1607.07,518.91 on Mechanical 1
275.59,2716.54 to 410,2590 on Mechanical 1
1417.32,629.92 to 1771.65,0 on Mechanical 1
0,3346.46 to 0,0 on Mechanical 1
196.85,2716.54 to 0,0 on Mechanical 1
354.33,2716.54 to 0,3346.46 on Mechanical 1
275.59,2795.28 to 1771.65,3346.46 on Mechanical 1
275.59,2637.8 to 0,3346.46 on Mechanical 1
0,0 to 1496.06,708.66 on Mechanical 1
1496.06,551.18 to 1771.65,0 on Mechanical 1
0,0 to 1771.65,0 on Mechanical 1

## Text inside footprints (layer, text, board x,y; h text height)
C7: Top Overlay "+" at 551.5,1674.53 h30 r180
C9: Top Overlay "+" at 825,1275 h30 r270